# Altium PCB 功能版.PcbDoc
Units mil, origin at the board's own origin, x right, y up, seen from the top; angles counter-clockwise.
Board outline 2760 x 2750 mil, 2 copper layers (Top Layer, Bottom Layer); 12 components, 39 nets, 84 pads, 0 vias.
Unrouted connection lines stored in the file: 15.
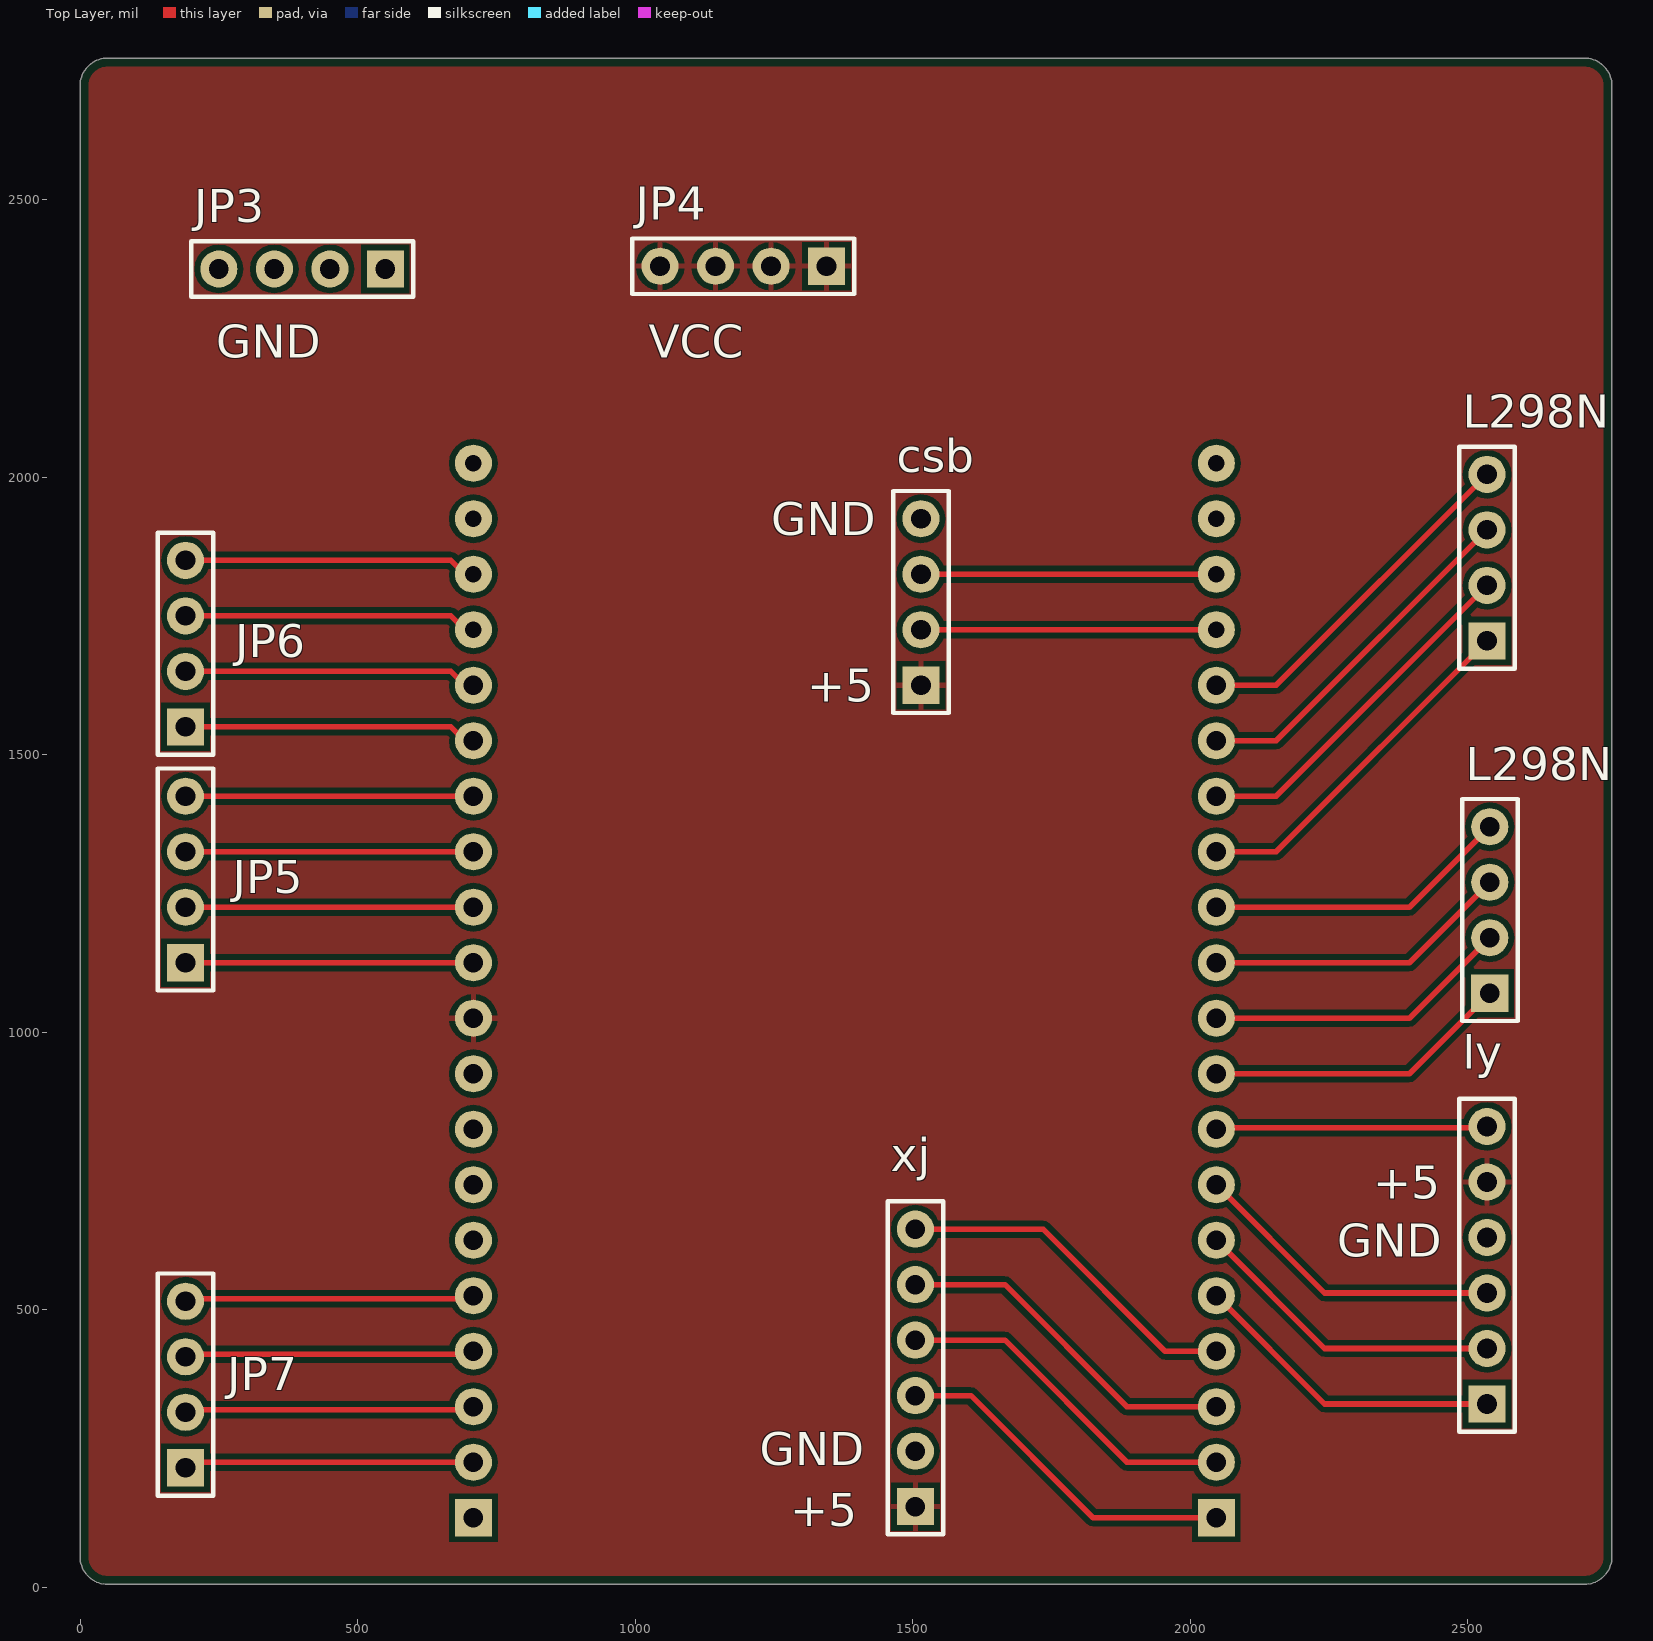
[diagram p0: Top Layer view]
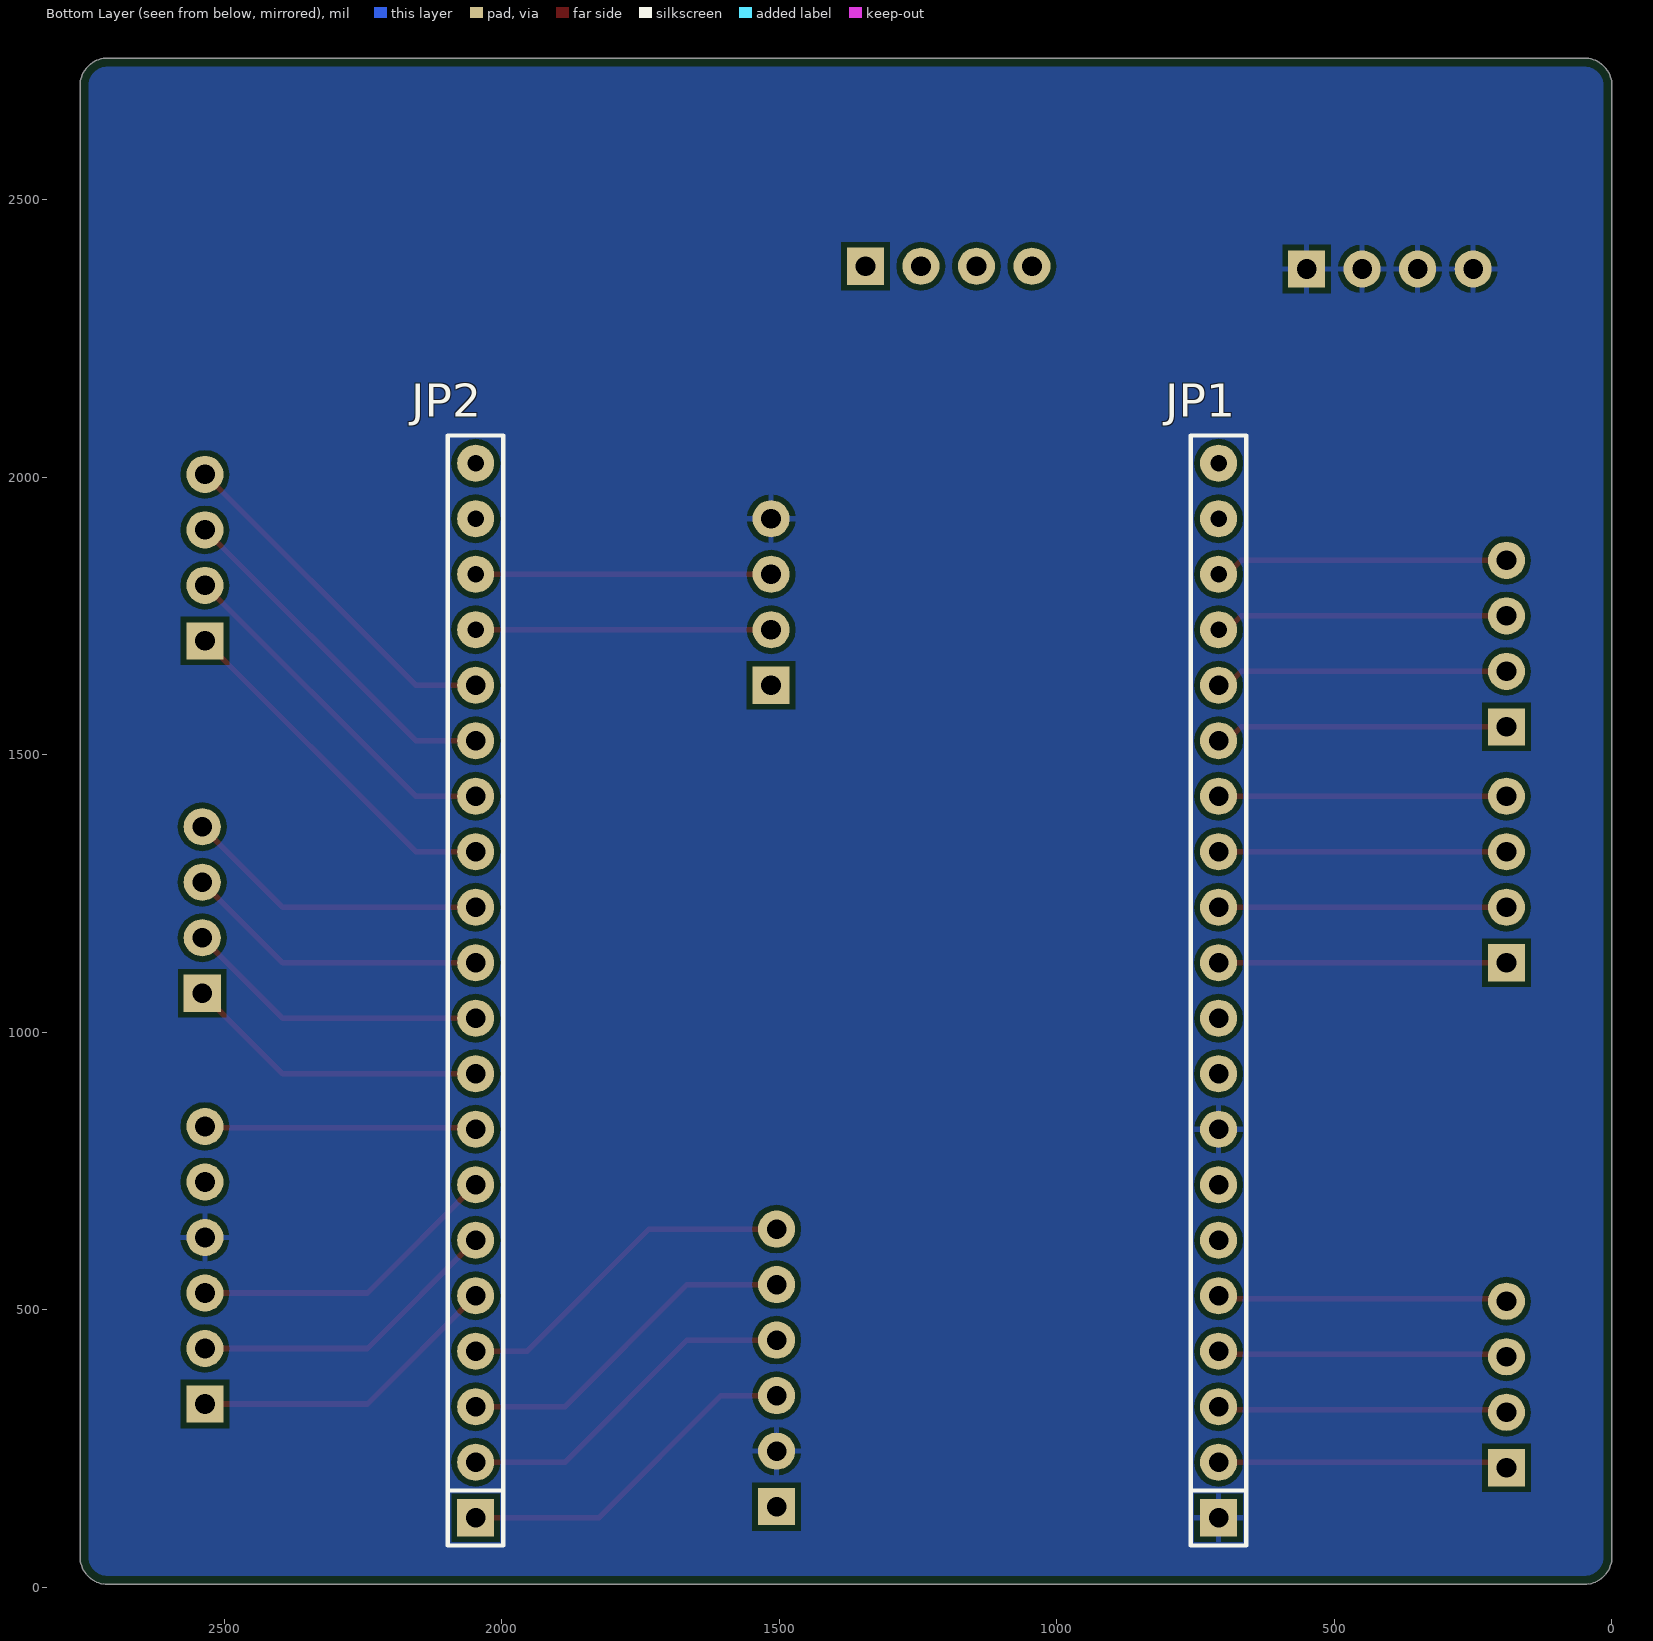
[diagram p1: Bottom Layer view, seen from below]

## Layer stack, top to bottom
Top Solder: solder mask 0.4, Solder Resist, Dk 3.5
Top Layer: signal copper 1.4
Dielectric 1: dielectric 12.6, FR-4, Dk 4.8
Bottom Layer: signal copper 1.4
Bottom Solder: solder mask 0.4, Solder Resist, Dk 3.5

## Board outline
0,55 0,2705 cw(c50,2705) 50,2755 2710,2755 cw(c2710,2705) 2760,2705 2760,55 cw(c2710,55) 2710,5 50,5 cw(c50,55)

## Design rules (kind name [scope] priority, off if disabled: settings)
BoardOutlineClearance [All] p1: gap=15 ignorepadtopadclearanceinfootprint=FALSE
Clearance [All] p1: gap=10 ignorepadtopadclearanceinfootprint=FALSE except(0: Arc-Hole Track-Hole SMDPad-Hole THPad-Hole Via-Hole Fill-Hole Poly-Hole Region-Hole Text-Hole)
PolygonConnect [All] p1: connectstyle=Relief reliefconductorwidth=10 reliefentries=4 polygonreliefangle="90 Angle" airgapwidth=10
RoutingVias [All] p1: holewidth=28 width=50 viastyle="Through Hole" minholewidth=28 minwidth=50 maxholewidth=28 maxwidth=50
SolderMaskExpansion [All] p1: expansion=4
Width [All] p1: maxlimit=10 minlimit=10 preferedwidth=10
30 further rules are at their usual default settings.

## Classes and differential pairs
component class 功能版: csb JP1 JP2 JP3 JP4 JP5 JP6 JP7 L298N ly xj

## Components (designator, comment, footprint, x,y, rotation, side; value= is the part's Value field where it differs from the comment)
csb "HDR-1X4" HDR-1X4 1515,1625 r90 top
JP1 "HDR-1X20" HDR-1X20_M 708.66,125 r90 bottom
JP2 "HDR-1X20" HDR-1X20_M 2047.24,125 r90 bottom
JP3 "HDR-1X4" HDR-1X4 550,2375 r180 top
JP4 "HDR-1X4" HDR-1X4 1345,2380 r180 top
JP5 "HDR-1X4" HDR-1X4 190,1125 r90 top
JP6 "HDR-1X4" HDR-1X4 190,1550 r90 top
JP7 "HDR-1X4" HDR-1X4 190,215 r90 top
L298N "HDR-1X4" HDR-1X4 2535,1705 r90 top
L298N "HDR-1X4" HDR-1X4 2540,1070 r90 top
ly "HDR-1X6" HDR-1X6_M 2535,330 r90 top
xj "HDR-1X6" HDR-1X6_M 1505,145 r90 top

## Footprints (in the part's own frame and the unit in brackets; to place one, negate y for a bottom-side part, rotate by r counter-clockwise, add the part's x,y. Pads: shape width x height; smd on the part's side, far side on the other; paste and mask are expansions set on the pad)
HDR-1X4 [mm] "排针，4脚"
  rect 1.7x1.7 hole 0.9: 1(0,0)
  round 1.7 hole 0.9: 2(2.54,0) 3(5.08,0) 4(7.62,0)
  silkscreen extent -1.27,-1.27 8.89,1.27, body extent -1.27,-1.27 8.89,1.27, height 8.5
HDR-1X6_M [mm] "排母，6脚"
  rect 1.7x1.7 hole 0.9: 1(0,0)
  round 1.7 hole 0.9: 2(2.54,0) 3(5.08,0) 4(7.62,0) 5(10.16,0) 6(12.7,0)
  silkscreen extent -1.27,-1.27 13.97,1.27, body extent -1.27,-1.27 13.97,1.27, height 8.5
HDR-1X20_M [mm] "排母，20脚"
  rect 1.7x1.7 hole 0.9: 1(0,0)
  round 1.7 hole 0.9: 2(2.54,0) 3(5.08,0) 4(7.62,0) 5(10.16,0) 6(12.7,0) 7(15.24,0) 8(17.78,0) 9(20.32,0) 10(22.86,0) 11(25.4,0) 12(27.94,0) 13(30.48,0) 14(33.02,0) 15(35.56,0) 16(38.1,0)
  round 1.7 hole 0.762: 17(40.64,0) 18(43.18,0) 19(45.72,0) 20(48.26,0)
  silkscreen extent -1.27,-1.27 49.53,1.27, body extent -1.27,-1.27 49.53,1.27, height 8.5

## Part data
csb JP3 JP4 JP5 JP6 JP7 L298N L298N: library part "Header 4", "4P接插件"
JP1 JP2: library part "Header 20", "20P接插件"
ly xj: library part "Header 6", "6P接插件"

## Nets (pads, with @x,y where several pads share a name; then routed paths per layer and width w, separated by ;. In a path a pad name is that pad's centre, name@x,y a point inside that pad or via, vN(x,y) a via of type N, cw(c..) or ccw(c..) an arc to the next point about the centre after c; other vN are vias at no path point)
+5: csb.1 JP1.10 JP4.1 JP4.2 JP4.3 JP4.4 ly.5 xj.1
GND: csb.4 JP1.1 JP1.8 JP3.1 JP3.2 JP3.3 JP3.4 ly.4 xj.2
P0_0: JP2.16 L298N.4@2535,2005 | length 645.2
  Top Layer w10: JP2.16 2155,1625 L298N.4@2535,2005
P0_1: csb.2 JP2.17 | length 532.2
  Top Layer w10: csb.2 JP2.17
P0_2: csb.3 JP2.18 | length 532.2
  Top Layer w10: csb.3 JP2.18
P0_3: JP2.19
P0_4: JP2.20
P0_5: JP1.20
P0_6: JP1.19
P0_7: JP1.18 JP6.4 | length 529
  Top Layer w10: JP6.4 668.26,1850 693.26,1825 JP1.18
P1_0: JP1.17 JP6.3 | length 529
  Top Layer w10: JP6.3 668.26,1750 693.26,1725 JP1.17
P1_1: JP1.16 JP6.2 | length 529
  Top Layer w10: JP6.2 668.26,1650 693.26,1625 JP1.16
P1_2: JP1.14 JP5.4 | length 518.7
  Top Layer w10: JP5.4 JP1.14
P1_3: JP1.13 JP5.3 | length 518.7
  Top Layer w10: JP5.3 JP1.13
P1_4: JP1.12 JP5.2 | length 518.7
  Top Layer w10: JP5.2 JP1.12
P1_5: JP1.11 JP5.1 | length 518.7
  Top Layer w10: JP5.1 JP1.11
P2_0: JP2.6 ly.2 | length 568.5
  Top Layer w10: JP2.6 2242.24,430 ly.2
P2_1: JP2.7 ly.3 | length 568.5
  Top Layer w10: JP2.7 2242.24,530 ly.3
P2_2: JP2.8 ly.6 | length 489.8
  Top Layer w10: JP2.8 2049.74,827.5 2532.5,827.5 ly.6
P2_3: JP2.9 L298N.1@2540,1070 | length 567
  Top Layer w10: JP2.9@2057.24,915 JP2.9 2395,925 L298N.1@2540,1070
P2_4: JP2.10 L298N.2@2540,1170 | length 552.8
  Top Layer w10: JP2.10 2395,1025 L298N.2@2540,1170
P2_5: JP2.11 L298N.3@2540,1270 | length 552.8
  Top Layer w10: JP2.11 2395,1125 L298N.3@2540,1270
P2_6: JP2.12 L298N.4@2540,1370 | length 552.8
  Top Layer w10: JP2.12 2395,1225 L298N.4@2540,1370
P2_7: JP2.13 L298N.1@2535,1705 | length 645.2
  Top Layer w10: JP2.13 2155,1325 L298N.1@2535,1705
P3_2: JP1.6
P3_3: JP1.5 JP7.4 | length 522.8
  Top Layer w10: JP7.4 195,520 703.66,520 JP1.5
P3_4: JP1.4 JP7.3 | length 522.8
  Top Layer w10: JP7.3 195,420 703.66,420 JP1.4
P3_5: JP1.3 JP7.2 | length 522.8
  Top Layer w10: JP7.2 195,320 703.66,320 JP1.3
P3_6: JP1.2 JP7.1 | length 522.8
  Top Layer w10: JP7.1 200,225 JP1.2
P3_7: JP2.1 xj.3 | length 633.4
  Top Layer w10: xj.3 1605,345 1825,125 JP2.1
P4_0: JP1.7
P4_1: JP2.2 xj.4 | length 633.4
  Top Layer w10: xj.4 1666.12,445 1886.12,225 JP2.2
P4_2: JP2.3 xj.5 | length 633.4
  Top Layer w10: xj.5 1666.12,545 1886.12,325 JP2.3
P4_3: JP2.4 xj.6 | length 633.4
  Top Layer w10: xj.6 1735,645 1955,425 JP2.4
P4_4: JP2.5 ly.1 | length 568.5
  Top Layer w10: JP2.5 2242.24,330 ly.1
P4_5: JP2.14 L298N.2@2535,1805 | length 645.2
  Top Layer w10: JP2.14 2155,1425 L298N.2@2535,1805
P4_6: JP2.15 L298N.3@2535,1905 | length 645.2
  Top Layer w10: JP2.15 2155,1525 L298N.3@2535,1905
P4_7: JP1.15 JP6.1 | length 529
  Top Layer w10: JP6.1 668.26,1550 693.26,1525 JP1.15
P5_5: JP1.9

## Polygon pours and split planes (outlines as drawn)
+5 on Top Layer "Top Layer-No Net" (solid, remove dead copper, pour order 0): 0,55 0,2705 cw(c50,2705) 50,2755 2710,2755 cw(c2710,2705) 2760,2705 2760,55 cw(c2710,55) 2710,5 50,5 cw(c50,55)
GND on Bottom Layer "Top Layer-No Net1" (solid, remove dead copper, pour order 1): 0,55 0,2705 cw(c50,2705) 50,2755 2710,2755 cw(c2710,2705) 2760,2705 2760,55 cw(c2710,55) 2710,5 50,5 cw(c50,55)

## Silkscreen, mask and mechanical layers (free items; w line width, h text height)
Top Overlay:
  text "GND" at 245,2215 h60
  text "VCC" at 1025,2215 h60
  text "GND" at 1245,1895 h60
  text "+5" at 1310,1595 h60
  text "+5" at 2330,700 h60
  text "GND" at 2265,595 h60
  text "GND" at 1225,220 h60
  text "+5" at 1280,110 h60
Bottom Solder:
  the board outline again, w10